# Altium PCB STM32_display_test_board.PcbDoc
Units mil, origin at the board's own origin, x right, y up, seen from the top; angles counter-clockwise.
Board outline 3128.03 x 3003.03 mil, 4 copper layers (Top Layer(SIG/PWR), Int1 (GND), Int2 (GND), Bottom Layer(SIG/PWR)), stack 73.221 mil thick; 65 components, 73 nets, 303 pads, 105 vias.
Unrouted connection lines stored in the file: 17.
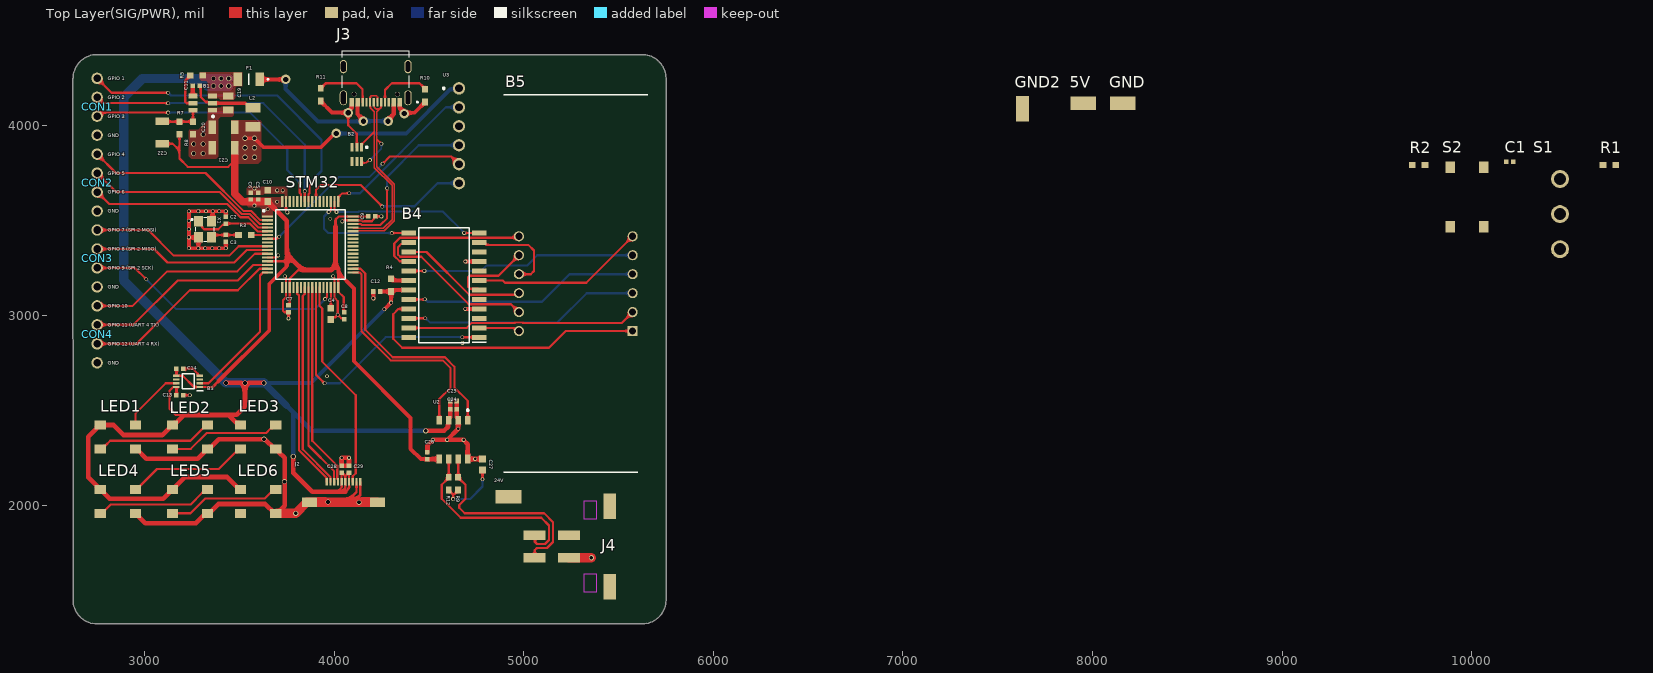
[diagram p0: Top Layer(SIG/PWR) view]
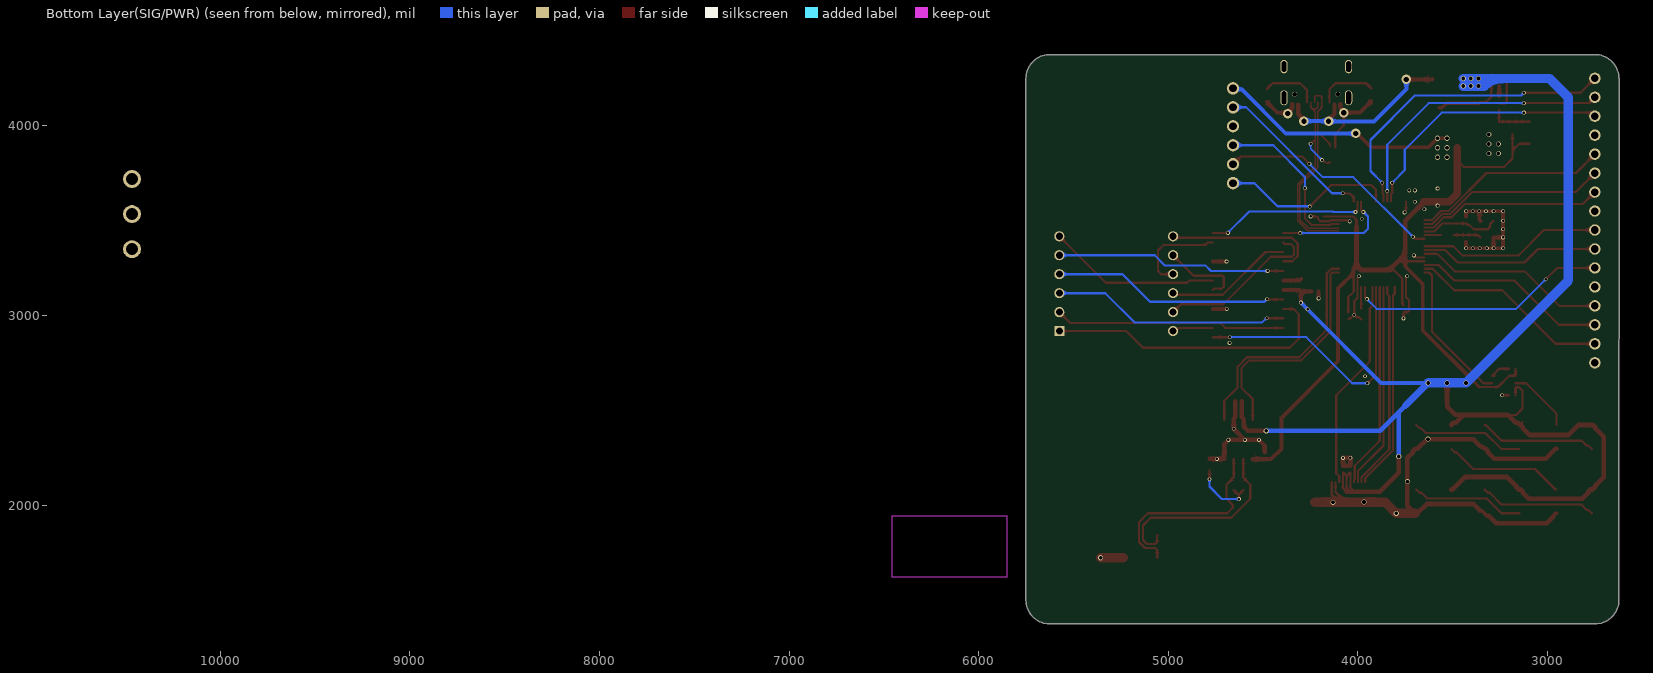
[diagram p1: Bottom Layer(SIG/PWR) view, seen from below]
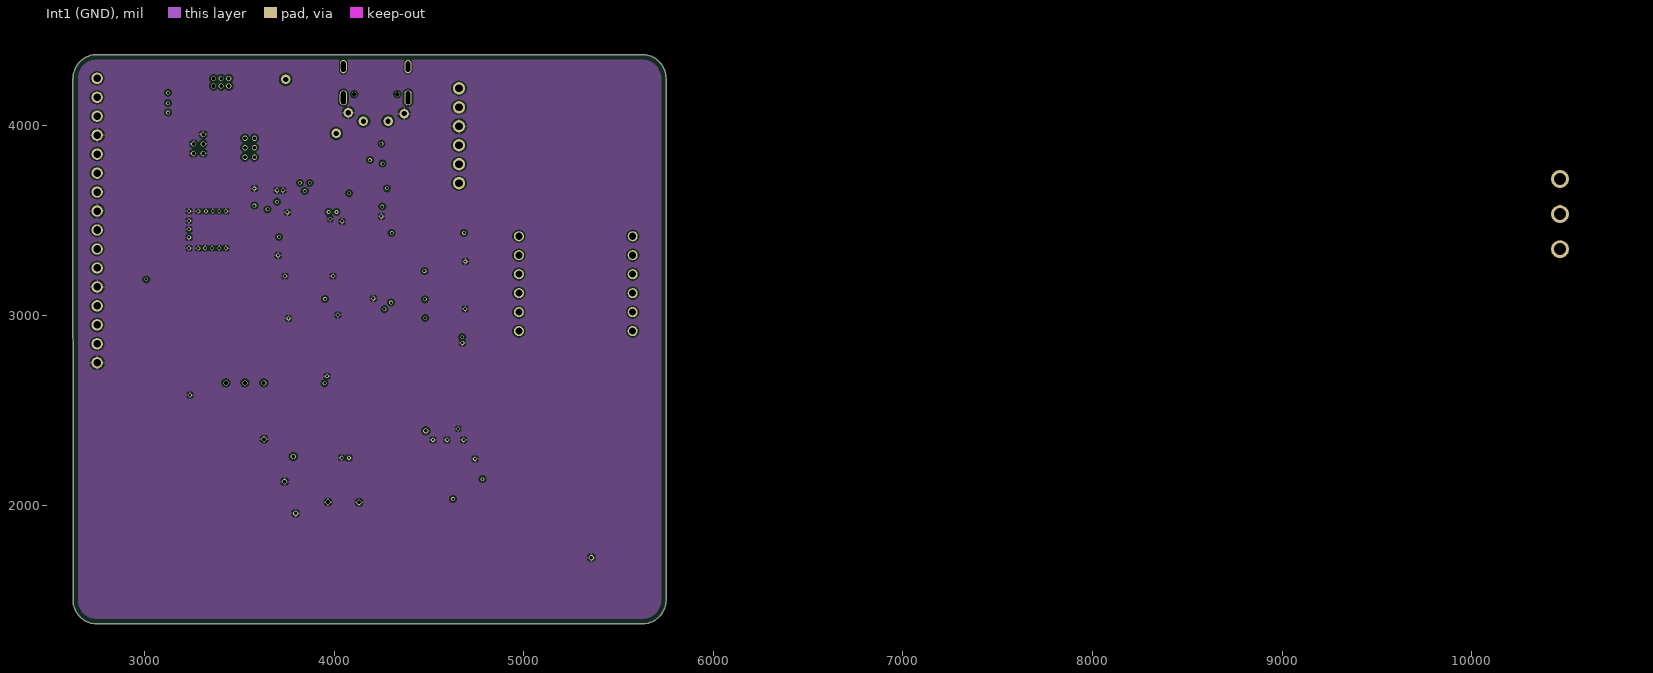
[diagram p2: Int1 (GND)]
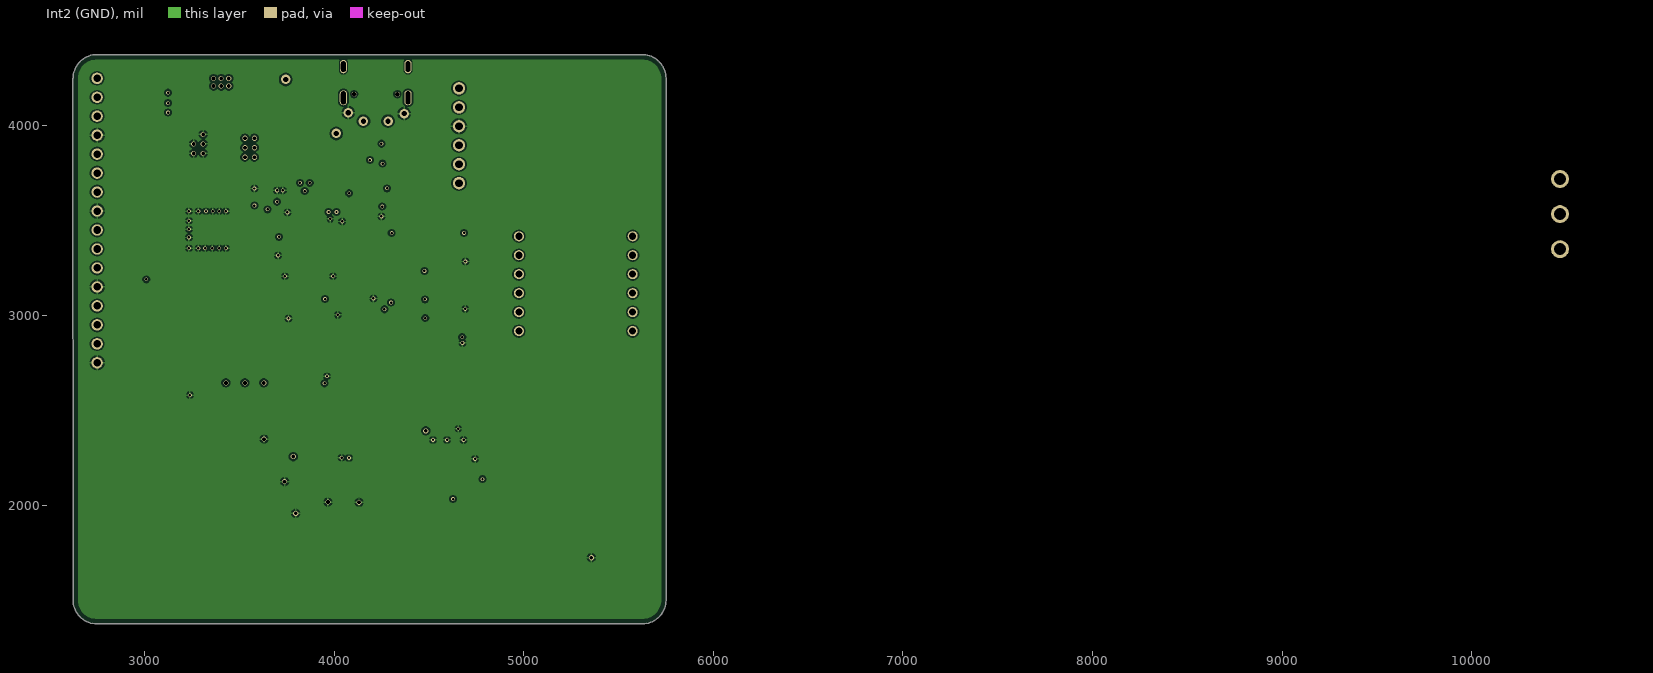
[diagram p3: Int2 (GND)]

## Layer stack, top to bottom
Top Solder: solder mask 1, SM-001, Dk 4
Top Layer(SIG/PWR): signal copper 1.378
Dielectric 2: prepreg 8.2835, PP-022, Dk 4.5
Int1 (GND): signal copper 5.9843
Dielectric 3: core 41.9291, Core-039, Dk 4.8
Int2 (GND): signal copper 5.9843
Dielectric 4: prepreg 8.2835, PP-022, Dk 4.5
Bottom Layer(SIG/PWR): signal copper 1.378
Bottom Solder: solder mask 1, SM-001, Dk 4

## Board outline
2623.99,1498.87 ccw(c2750,1500) 2748.87,1373.99 2750,1373.48 5625,1373.48 5626.13,1373.99 ccw(c5625,1500) 5751.01,1498.87 5751.51,1500 5751.52,4250 5751.01,4251.13 ccw(c5625,4250) 5632.3,4375.8 5631.01,4376.51 2750,4376.52 2748.87,4376.01 ccw(c2750,4250) 2623.99,4251.13 2623.49,4250

## Design rules (kind name [scope] priority, off if disabled: settings)
Clearance [All] p1: gap=10 ignorepadtopadclearanceinfootprint=FALSE except(0: Arc-Hole Track-Hole SMDPad-Hole Via-Hole Fill-Hole Poly-Hole Region-Hole Text-Text Text-Hole; 5: Arc-Arc Arc-Track Arc-SMDPad Track-Track Track-SMDPad SMDPad-SMDPad; 7.87: Arc-Text Track-Text SMDPad-Fill SMDPad-Poly SMDPad-Region THPad-Fill THPad-Poly THPad-Region Fill-Fill Fill-Poly Fill-Region Poly-Poly Poly-Region Region-Region; 12.99: Arc-THPad Track-THPad SMDPad-THPad; 19.68: THPad-THPad THPad-Hole)
DiffPairsRouting [All] p1: maxlimit=10 minlimit=5 mostfreqgap=10 toplayer_maxgap=5 toplayer_prefgap=5 toplayer_minwidth=7.81 toplayer_maxwidth=7.81 toplayer_prefwidth=7.81 bottomlayer_maxgap=5 bottomlayer_prefgap=5 bottomlayer_minwidth=7.81 bottomlayer_maxwidth=7.81 bottomlayer_prefwidth=7.81 impedanceprofiledriven=TRUE impedanceprofileid={41886173-6EE0-4018-A958-A0CD32709ABE} impedanceprofilevalue=90.000000 maxuncoupledlength=500
HoleSize Pad_HoleSize [IsPad] p1: absolutevalues=TRUE maxlimit=248.03 minlimit=19.68 maxpercent=80.000 minpercent=20.000
HoleSize [All] p2: absolutevalues=TRUE maxlimit=248.03 minlimit=7.87 maxpercent=80.000 minpercent=20.000
MinimumAnnularRing [All] p1: minimumring=7.87
PolygonConnect GND_PolygonConnect [OnLayer('Int1 (GND)') OR OnLayer('Int2 (GND)')] p1: connectstyle=Relief reliefconductorwidth=10 reliefentries=4 polygonreliefangle="90 Angle" airgapwidth=10
PolygonConnect [All] p2: connectstyle=Direct reliefconductorwidth=10 reliefentries=4 polygonreliefangle="90 Angle" airgapwidth=10
RoutingVias [All] p1: holewidth=28 width=50 viastyle="Through Hole" minholewidth=7.87 minwidth=9.84 maxholewidth=28 maxwidth=50
SilkToSilkClearance [All] p1: silktosilkclearance=0
SilkToSolderMaskClearance [IsPad] p1: minsilkscreentomaskgap=5.91 clearancetoexposedcopper=TRUE
SolderMaskExpansion [All] p1: expansion=4 istentingtop=FALSE
Width [All] p1: maxlimit=78.74 minlimit=7.87 preferedwidth=10
26 further rules are at their usual default settings.

## Classes and differential pairs
component class Power: 5V 24V B1 C11 C19 C20 C21 C22 F1 FRAME2 GND GND2 L2 R5 R7 R8
component class MCU: C1 C2 C3 C4 C5 C6 C7 C8 C9 C10 FRAME1 R1 R2 R3 S1 S2 STM32 X1
component class Connect: B2 B3 B4 B5 C12 C13 C14 C24 C25 C26 C27 C28 C29 CON1 CON2 CON3 CON4 FRAME3 J2 J3 J4 LED1 LED2 LED3 LED4 LED5 LED6 R4 R9 R10 R11 R12 U2 U3
differential pair MCU_USB: +MCU_USB_P -MCU_USB_N

## Components (designator, comment, footprint, x,y, rotation, side; value= is the part's Value field where it differs from the comment)
5V "Test Point for Probing" 5015 7950,4120 r0 top
24V "Test Point for Probing" 5015 4920,2045 r180 top
B1 "TPS54202DDCR" SOT-23-6 3307,4120 r90 top
B2 "TPD4E1U06DCKR" SC-70-6 4120,3850 r270 top
B3 "SN74LXC2T45DCUR" VSSOP-8 3230.58,2652.92 r180 top
B4 "MAX7221EWG+" SOIC-24 4580,3160 r180 top
B5 "LTC-5723HR" 7SEGMENT_DISP_12_P_TH 5275,3168 r180 top
C1 "100n" 0402_CAP 10200,3810 r0 top
C2 "10p" 0402_CAP 3430,3503.11 r270 top
C3 "10p" 0402_CAP 3430,3406.89 r90 top
C4 "4u7" 0603-CAP 3983,3009 r270 top
C5 "100n" 0402_CAP 3600,3630 r270 top
C6 "100n" 0402_CAP 3560,3630 r270 top
C7 "100n" 0402_CAP 3760,3036 r90 top
C8 "100n" 0402_CAP 4053,2998 r90 top
C9 "100n" 0402_CAP 4199,3523 r180 top
C10 "1u" 0603-CAP 3650,3630.47 r90 top
C11 "100n" 0402_CAP 3273.11,4211 r180 top
C12 "100n" 0402_CAP 4226,3127 r0 top
C13 "100n" 0402_CAP 3187.11,2580 r0 top
C14 "100n" 0402_CAP 3187,2719 r180 top
C19 "10u" 0805-CAP 3442,4121 r270 top
C20 "22u" 1206-CAP 3418.06,3993 r180 top
C21 "22u" 1206-CAP 3418.06,3884 r180 top
C22 "56p" 1206-CAP 3095,3965 r90 top
C24 "100n" 0402_CAP 4630,2505 r180 top
C25 "100n" 0402_CAP 4630,2549 r180 top
C26 "100n" 0402_CAP 4492,2261.11 r270 top
C27 "4n7" 0603-CAP 4783,2214.53 r270 top
C28 "100n" 0402_CAP 4040,2190 r270 top
C29 "100n" 0402_CAP 4079,2190 r270 top
CON1 "HEAD_4_P" 1X04 2751,4251 r0 top
CON2 "HEAD_4_P" 1X04 2751,3851 r0 top
CON3 "HEAD_4_P" 1X04 2751,3451 r0 top
CON4 "HEAD_4_P" 1X04 2751,3051 r0 top
F1 "1206L050YR" 1206-FUSE 3550,4246 r180 top
GND "Test Point for Probing" 5015 8160,4120 r0 top
GND2 "Test Point for Probing" 5015 7630,4090 r90 top
J2 "505110-1092" MOLEX_FPC_CLAMSHELL_10 4050,2025 r0 top
J3 "CONNECTOR_USB_C" VALCON_USB_C 4219.84,4125 r180 top
J4 "HyTech CAN Connector" MOLEX_MICROFIT_SMD_RIGHTANGLE_04_DUAL 5454,1782 r90 top
L2 "10u" 1210_IND 3572,4045 r270 top
LED1 "IN-PI55QATPRPGPBPW-40  Neopixel RGBW LED  Datasheet" NEOPIXEL 2860,2360 r0 top
LED2 "IN-PI55QATPRPGPBPW-40  Neopixel RGBW LED  Datasheet" NEOPIXEL 3240,2360 r0 top
LED3 "IN-PI55QATPRPGPBPW-40  Neopixel RGBW LED  Datasheet" NEOPIXEL 3600,2360 r0 top
LED4 "IN-PI55QATPRPGPBPW-40  Neopixel RGBW LED  Datasheet" NEOPIXEL 2860,2020 r0 top
LED5 "IN-PI55QATPRPGPBPW-40  Neopixel RGBW LED  Datasheet" NEOPIXEL 3240,2020 r0 top
LED6 "IN-PI55QATPRPGPBPW-40  Neopixel RGBW LED  Datasheet" NEOPIXEL 3600,2020 r0 top
R1 "10k" 0603-RES 10725,3795 r0 top
R2 "10k" 0603-RES 9720,3795 r0 top
R3 "0R" 0603-RES 3530,3425 r0 top
R4 "9.53k" 0603-RES 4301,3160 r270 top
R5 "100k" 0603-RES 3275,4265 r180 top
R7 "100k" 0603-RES 3185,3989 r90 top
R8 "22k" 0603-RES 3256,3989 r270 top
R9 "60R4" 0603-RES 4655,2114 r270 top
R10 "5k1" 0603-RES 4480,4160 r270 top
R11 "5k1" 0603-RES 3930,4165 r270 top
R12 "60R4" 0603-RES 4605,2114 r90 top
S1 "Single pole, double throw switch  Datasheet" CS12ANW03 10465,3535 r0 top
S2 "Button Datasheet" B3S-100X 9975,3625 r90 top
STM32 "STM32F446RET6" LQFP-64-STM32 3875,3375 r0 top
U2 "TCAN1051" "SOIC-08(NARROW,0-15\")" 4630,2346 r180 top
U3 "ST_LINK_SW_DEBUG" HEADER_6_P 4659,3698 r0 top
X1 "Crystal  Datasheet Recommended load capacitor for the ECS-160-10-42-CKM-TR:  VJ0603A150FXQPW1BC" XTAL_SMD3225-4P 3320,3455 r270 top

## Footprints (in the part's own frame and the unit in brackets; to place one, negate y for a bottom-side part, rotate by r counter-clockwise, add the part's x,y. Pads: shape width x height; smd on the part's side, far side on the other; paste and mask are expansions set on the pad)
1X04 [mil]
  round 60 hole 40: 1(0,0) 2(0,-100) 3(0,-200) 4(0,-300)
7SEGMENT_DISP_12_P_TH [mm]
  rect 1.35x1.35 / inner round 1.35 / far side rect 1.35x1.35 hole 0.95: 1(-7.62,6.35)
  round 1.35 hole 0.95: 2(-7.62,3.81) 3(-7.62,1.27) 4(-7.62,-1.27) 5(-7.62,-3.81) 6(-7.62,-6.35) 7(7.62,-6.35) 8(7.62,-3.81) 9(7.62,-1.27) 10(7.62,1.27) 11(7.62,3.81) 12(7.62,6.35)
  silkscreen extent -9.62,-25.27 9.62,25.27, body extent -9.55,-25.15 9.45,25.15, height 8.25
0402_CAP [mm]
  rect 0.6x0.62 smd: 1(-0.46,0) 2(0.46,0)
  body extent -0.5,-0.25 0.5,0.25, height 0.33
0603-CAP [mil]
  rect 35.43x35.43 smd: 1(-29.53,0) 2(29.53,0)
  body extent -36,-19 33,19, height 36
0603-RES [mil]
  rect 35.43x31.5 smd: 1(-33.46,0) 2(33.46,0)
  body extent -31,-16 31,16, height 22
0805-CAP [mil]
  rect 37.4x55.12 smd: 1(-36.42,0) 2(36.42,0)
  body extent -40,-25 40,25, height 37
1206-CAP [mm]
  rect 1x1.8 smd: 1(-1.5,0) 2(1.5,0)
  body extent -1.6,-0.8 1.6,0.8, height 0.94
1206-FUSE [mm]
  rect 1.16x1.82 smd: 1(-1.475,0) 2(1.475,0)
  silkscreen extent -2.7,-0.72 0,0.72, body extent -1.6,-0.83 1.6,0.83, height 1.25
1210_IND [mm] "Inductor of 1210 Case  Size"
  rect 1.25x2 smd: 1(-1.275,0) 2(1.275,0)
  body extent -1.6,-1.25 1.6,1.25, height 1.7
5015 [mil]
  rect 135x70 smd: 1(0,0)
B3S-100X [mil]
  rect 61.02x51.18 smd: 1(156.5,-88.58) 2(-156.5,-88.58) 3(156.5,88.58) 4(-156.5,88.58)
CS12ANW03 [mm]
  round 2.4 hole 1.6: 1(0,-4.7) 2(0,0) 3(0,4.7)
HEADER_6_P [mil]
  round 65 hole 40: 1(0,500) 2(0,400) 3(0,300) 4(0,200) 5(0,100) 6(0,0)
  silkscreen extent -85,495 -75,505
LQFP-64-STM32 [mm] "64 pin LQFP package for STM32F446RET6 and similar"
  rect 1.475x0.3 smd: 1(-5.738,3.75) 2(-5.738,3.25) 3(-5.738,2.75) 4(-5.738,2.25) 5(-5.738,1.75) 6(-5.738,1.25) 7(-5.738,0.75) 8(-5.738,0.25) 9(-5.738,-0.25) 10(-5.738,-0.75) 11(-5.738,-1.25) 12(-5.738,-1.75) 13(-5.738,-2.25) 14(-5.738,-2.75) 15(-5.738,-3.25) 16(-5.738,-3.75) 33(5.738,-3.75) 34(5.738,-3.25) 35(5.738,-2.75) 36(5.738,-2.25) 37(5.738,-1.75) 38(5.738,-1.25) 39(5.738,-0.75) 40(5.738,-0.25) 41(5.738,0.25) 42(5.738,0.75) 43(5.738,1.25) 44(5.738,1.75) 45(5.738,2.25) 46(5.738,2.75) 47(5.738,3.25) 48(5.738,3.75)
  rect 0.3x1.475 smd: 17(-3.75,-5.738) 18(-3.25,-5.738) 19(-2.75,-5.738) 20(-2.25,-5.738) 21(-1.75,-5.738) 22(-1.25,-5.738) 23(-0.75,-5.738) 24(-0.25,-5.738) 25(0.25,-5.738) 26(0.75,-5.738) 27(1.25,-5.738) 28(1.75,-5.738) 29(2.25,-5.738) 30(2.75,-5.738) 31(3.25,-5.738) 32(3.75,-5.738) 49(3.75,5.738) 50(3.25,5.738) 51(2.75,5.738) 52(2.25,5.738) 53(1.75,5.738) 54(1.25,5.738) 55(0.75,5.738) 56(0.25,5.738) 57(-0.25,5.738) 58(-0.75,5.738) 59(-1.25,5.738) 60(-1.75,5.738) 61(-2.25,5.738) 62(-2.75,5.738) 63(-3.25,5.738) 64(-3.75,5.738)
  silkscreen extent -6.35,-4.65 4.65,4.65, body extent -6,-6 6,6, height 1.6
MOLEX_FPC_CLAMSHELL_10 [mm]
  rect 0.3x1 smd: 1(-2.25,2.475) 2(-1.75,2.475) 3(-1.25,2.475) 4(-0.75,2.475) 5(-0.25,2.475) 6(0.25,2.475) 7(0.75,2.475) 8(1.25,2.475) 9(1.75,2.475) 10(2.25,2.475)
  rect 2x1.3 smd: 11(-4.55,-0.225) 12(4.55,-0.225)
  body extent -5.25,-2.6 5.25,2.7, height 1.88
MOLEX_MICROFIT_SMD_RIGHTANGLE_04_DUAL [mil]
  rect 50x115 smd: 1(59.06,215.5) 2(-59.06,215.5) 3(59.06,397.5) 4(-59.06,397.5)
  rect 135x65 smd: PAD1(212.06,0) PAD2(-212.06,0)
  Top Layer(SIG/PWR) keep-out region: 144.56,71 144.56,134 240.56,134 240.56,71
  Top Layer(SIG/PWR) keep-out region: -240.56,71 -240.56,134 -144.56,134 -144.56,71
  Top Layer(SIG/PWR) keep-out region: -240.56,71 -240.56,134 -144.56,134 -144.56,71
  Top Layer(SIG/PWR) keep-out region: 144.56,71 144.56,134 240.56,134 240.56,71
  Bottom Layer(SIG/PWR) keep-out region: -159.06,-1005 -159.06,-395 159.06,-395 159.06,-1005
  body extent -274,-180 264,426, height 345
NEOPIXEL [mm]
  rect 1.5x1.2 smd: 1(-2.35,1.6) 2(-2.35,-1.6) 3(2.35,-1.6) 4(2.35,1.6)
  body extent -2.6,-2.5 2.6,2.5, height 1.7
SC-70-6 [mm]
  rect 1.2x0.4 smd: 1(-0.95,0.65) 2(-0.95,0) 3(-0.95,-0.65) 4(0.95,-0.65) 5(0.95,0) 6(0.95,0.65)
  silkscreen extent -1.06,1.22 -0.82,1.46, body extent -1.05,-1 1.05,1, height 1
"SOIC-08(NARROW,0-15\")" [mil]
  rect 30x45 smd: 1(-75,-102.5) 2(-25,-102.5) 3(25,-102.5) 4(75,-102.5) 5(75,102.5) 6(25,102.5) 7(-25,102.5) 8(-75,102.5)
  silkscreen extent -81,-160 -70,-149, body extent -97,-119 97,119, height 64
SOIC-24 [mm]
  rect 1.925x0.65 smd: 1(-4.712,6.985) 2(-4.712,5.715) 3(-4.712,4.445) 4(-4.712,3.175) 5(-4.712,1.905) 6(-4.712,0.635) 7(-4.712,-0.635) 8(-4.712,-1.905) 9(-4.712,-3.175) 10(-4.712,-4.445) 11(-4.712,-5.715) 12(-4.712,-6.985) 13(4.712,-6.985) 14(4.712,-5.715) 15(4.712,-4.445) 16(4.712,-3.175) 17(4.712,-1.905) 18(4.712,-0.635) 19(4.712,0.635) 20(4.712,1.905) 21(4.712,3.175) 22(4.712,4.445) 23(4.712,5.715) 24(4.712,6.985)
  silkscreen extent -5.68,-7.7 3.4,7.7, body extent -5.16,-7.7 5.16,7.7, height 2.65
SOT-23-6 [mm]
  rect 0.62x1.22 smd: 1(-0.95,-1.31) 2(0,-1.31) 3(0.95,-1.31) 4(-0.95,1.31) 5(0,1.31) 6(0.95,1.31)
  silkscreen extent -1.9,-1.52 -1.65,-1.27, body extent -1.45,-1.4 1.45,1.4, height 1.1
VALCON_USB_C [mm] "VALCON_CSP-USC16-TR"
  rect 0.3x1.14 smd: A1(-3.35,0) A4(-2.55,0) A5(-1.25,0) A6(-0.25,0) A7(0.25,0) A8(1.25,0) A9(2.55,0) A12(3.35,0) B1(3.05,0) B4(2.25,0) B5(1.75,0) B6(0.75,0) B7(-0.75,0) B8(-1.75,0) B9(-2.25,0) B12(-3.05,0)
  oval 1x2 hole 0.65 slot 1.72 at 90 deg: S1(-4.325,-0.59) S2(4.325,-0.59)
  oval 0.9x1.8 hole 0.65 slot 1.4 at 90 deg: S3(-4.325,-4.77) S4(4.325,-4.77)
  round 0.65 hole 0.65 unplated: ""(-2.89,-1.07) ""(2.89,-1.07)
  silkscreen extent -5.68,-6.86 4.47,0.1, body extent -4.47,-7.3 4.47,0.45, height 3.26
VSSOP-8 [mm]
  rect 0.85x0.3 smd: 1(-1.575,0.75) 2(-1.575,0.25) 3(-1.575,-0.25) 4(-1.575,-0.75) 5(1.575,-0.75) 6(1.575,-0.25) 7(1.575,0.25) 8(1.575,0.75)
  silkscreen extent -2,-1 0.8,1.25, body extent -1.55,-1 1.55,1, height 0.77
XTAL_SMD3225-4P [mm]
  rect 1.4x1.2 smd: 1(-1.1,-0.85) 2(1.1,-0.85) 3(1.1,0.85) 4(-1.1,0.85)
  silkscreen extent -1.6,-1.8 1.6,1.25, body extent -1.6,-1.25 1.6,1.25, height 0.7

## Part data
5V 24V GND GND2: library part TEST_POINT, Manufacturer="Keystone Electronics", MPN=5015, DeviceSetName=TEST_POINT, DKPN=36-5015CT-ND, GateName_1=G$1, LibraryName=HyTechDevices, MOPN=534-5015, Package=5015, SymbolName_1=TEST_POINT
B1: "4.5V to 28V Input, 2A Output, EMI Friendly Synchronous Step-Down Converter", Manufacturer_Name="Texas Instruments", Mouser Part Number=595-TPS54202DDCR, Datasheet Link=http://www.ti.com/lit/gpn/tps54202, Geometry.Height=1.1mm, Manufacturer_Part_Number=TPS54202DDCR, Mouser Price/Stock=https://www.mouser.co.uk/ProductDetail/Texas-Instruments/TPS54202DDCR?qs=uP22XH7NdCsJtN%2Fq54jCtQ%3D%3D
B2: "Quad-Channel High-Speed ESD Protection Device", Manufacturer_Name="Texas Instruments", Mouser Part Number=595-TPD4E1U06DCKR, Datasheet Link=http://www.ti.com/lit/gpn/tpd4e1u06, Geometry.Height=1.1mm, Manufacturer_Part_Number=TPD4E1U06DCKR, Mouser Price/Stock=https://www.mouser.co.uk/ProductDetail/Texas-Instruments/TPD4E1U06DCKR?qs=FBI%252BX3tnPf27UOVCu86Dnw%3D%3D
B3: library part LEVEL_SHIFTER_3V3_TO_5V, "Translation - Voltage Levels 2-bit dual supply transceiver with configurable voltage-level shifting and 3-state outputs", Manufacturer_Name="Texas Instruments", Mouser Part Number=595-SN74LXC2T45DCUR, Datasheet Link=https://www.ti.com/lit/ds/symlink/sn74lxc2t45.pdf?ts=1639472823475&ref_url=https%253A%252F%252Fwww.ti.com%252Fproduct%252FSN74LXC2T45%253FkeyMatch%253DSN74LXC2T45DCUR%2526tisearch%253Dsearch-everything%2526usecase%253DOPN, Geometry.Height=0.9mm, Manufacturer_Part_Number=SN74LXC2T45DCUR, Mouser Price/Stock=https://www.mouser.co.uk/ProductDetail/Texas-Instruments/SN74LXC2T45DCUR?qs=TCDPyi3sCW3DKJ9sPzuW6Q%3D%3D
B4: "MAX7221EWG+, LED Display Driver, 8-Digits 64-Segments, 4  5.5 V, 24-Pin SOIC W", Manufacturer_Name="Analog Devices", Mouser Part Number=700-MAX7221EWG, Datasheet Link=http://datasheets.maximintegrated.com/en/ds/MAX7219-MAX7221.pdf, Geometry.Height=2.65mm, Manufacturer_Part_Number=MAX7221EWG+, Mouser Price/Stock=https://www.mouser.co.uk/ProductDetail/Analog-Devices-Maxim-Integrated/MAX7221EWG%2b?qs=1THa7WoU59EcwjgGV%252Bu7MA%3D%3D
B5: library part LED_7_SEGMENT_4_DIGIT, "LED Displays & Accessories 4 Digit, Red Normal Current, Common  Cathode", Manufacturer_Name=Lite-On, Manufacturer_Part_Number=LTC-4627JR, Mouser Part Number=859-LTC-4627JR, Datasheet Link=https://componentsearchengine.com/Datasheets/1/LTC-4627JR.pdf, Geometry.Height=7.25mm, Mouser Price/Stock=https://www.mouser.co.uk/ProductDetail/Lite-On/LTC-4627JR?qs=WxFF5lh7QM3%252BoGt5Rn2nWQ%3D%3D
C1 C5 C6 C7 C8 C9 C11 C12 C13 C14 C24 C25 C26 C28 C29: library part CAPACITOR_?_*0402, Capacitance=0.1µF, Manufacturer=Yageo, MPN=CC0603KRX7R0BB104, Package=0603-CAP, Tolerance=10%, Voltage=100V, DeviceName=0603, DeviceSetName=CAPACITOR_?_*, DKPN=311-1523-1-ND, GateName_1=G$1, LibraryName=HyTechDevices, MOPN=603-CC603KRX7R0BB104, SymbolName_1=CAPACITOR
C2 C3: library part CAPACITOR_?_*0402, "C0G", Capacitance=0.1µF, Manufacturer=Yageo, MPN=CC0603KRX7R0BB104, Package=0603-CAP, Tolerance=10%, Voltage=100V, DeviceName=0603, DeviceSetName=CAPACITOR_?_*, DKPN=311-1523-1-ND, GateName_1=G$1, LibraryName=HyTechDevices, MOPN=603-CC603KRX7R0BB104, SymbolName_1=CAPACITOR
C4 C10 C27: library part CAPACITOR_?_*0603, Capacitance=0.1µF, Manufacturer=Yageo, MPN=CC0603KRX7R0BB104, Package=0603-CAP, Tolerance=10%, Voltage=100V, DeviceName=0603, DeviceSetName=CAPACITOR_?_*, DKPN=311-1523-1-ND, GateName_1=G$1, LibraryName=HyTechDevices, MOPN=603-CC603KRX7R0BB104, SymbolName_1=CAPACITOR
C19: library part CAPACITOR_?_*0805, Capacitance=0.22µF, Manufacturer=KEMET, MPN=C0805C224K1RACTU, Package=0805-CAP, Tolerance=10%, Voltage=100V, DeviceName=0805, DeviceSetName=CAPACITOR_?_*, DKPN=399-8049-1-ND, GateName_1=G$1, LibraryName=HyTechDevices, MOPN=80-C0805C224K1R, SymbolName_1=CAPACITOR
C20 C21 C22: library part CAPACITOR_?_*1206, Capacitance=2.2µF, Manufacturer="AVX Corporation", MPN=12061C225K4T2A, Package=1206-CAP, Tolerance=10%, Voltage=100V, DeviceName=1206, DeviceSetName=CAPACITOR_?_*, DKPN=478-12144-1-ND, GateName_1=G$1, LibraryName=HyTechDevices, MOPN=581-12061C225K4T2A, SymbolName_1=CAPACITOR
CON1 CON2 CON3 CON4: library part CONNECTOR_HEADER_4, "4 Pin Standard Header"
F1: library part FUSE_RESETTABLE_1206, "Resettable POLYFUSE 100A 6V Littelfuse 0.5A Surface Mount Resettable Fuse, 6 V dc", Manufacturer_Name=LITTELFUSE, Mouser Part Number=576-1206L050YR, Datasheet Link=https://m.littelfuse.com/~/media/electronics/datasheets/resettable_ptcs/littelfuse_ptc_1206l_datasheet.pdf.pdf, Geometry.Height=0.75mm, Manufacturer_Part_Number=1206L050YR, Mouser Price/Stock=https://www.mouser.co.uk/ProductDetail/Littelfuse/1206L050YR?qs=PWhpLWeW8wckT8hV5jLiAA%3D%3D
J2: library part CONNECTOR-10_MOLEX_FPC_CLAMSHELL, Manufacturer_Name=Molex, Package=5051101092, DeviceSetName=505110-1092, GateName_1=G$1, Height=0mm, LibraryName=505110-1092, Manufacturer_Part_Number=505110-1092, Mouser_Part_Number=538-505110-1092, Mouser_Price-Stock=https://www.mouser.co.uk/ProductDetail/Molex/505110-1092?qs=BA62vJVifGrjJfo6A8tlOw%3D%3D, SymbolName_1=505110-1092
J3: "CSP-USC16-TR Valcon USB Type C Surface Mount PCB Socket", Package=None, Availability="In Stock", Check_prices=https://www.snapeda.com/parts/CSP-USC16-TR/Valcon/view-part/?ref=eda, MF=Valcon, MP=CSP-USC16-TR, Price=None, Purchase-URL=https://pricing.snapeda.com/search/part/CSP-USC16-TR/?ref=eda, SnapEDA_Link=https://www.snapeda.com/parts/CSP-USC16-TR/Valcon/view-part/?ref=snap
J4: library part CONNECTOR-CAN_?_*μF_S_RA, Manufacturer=Molex, MPN=0430450411, Package=MOLEX_MICROFIT_SMD_RIGHTANGLE_04_DUAL, DeviceName=μF_S_RA, DeviceSetName=CONNECTOR-CAN_?_*, DKPN=WM1832CT-ND, GateName_1=G$1, LibraryName=HyTechDevices, MOPN=538-43045-0411, SymbolName_1=CONNECTOR_CAN
L2: library part INDUCTOR_1210, CURRENT_RATED=1.4A, CURRENT_SATURATION=2A, INDUCTANCE=56µH, Manufacturer="Wurth Elektronik", MPN=74437349560, Package=WE-LMHI, Tolerance=20%, DCR=342mΩ, DeviceName=WELMHI, DeviceSetName=INDUCTOR_?_*, DKPN=732-11454-2-ND, GateName_1=G$1, LibraryName=HyTechDevices, MOPN=710-74437349560, SymbolName_1=INDUCTOR
LED1 LED2 LED3 LED4 LED5 LED6: library part NEOPIXEL_*IN-PI55QATPRPGPBPW-40, Manufacturer=Inolux, MPN=IN-PI55QATPRPGPBPW-40, Package=NEOPIXEL, DeviceName=IN-PI55QATPRPGPBPW-40, DeviceSetName=NEOPIXEL_*, DKPN=1830-1210-2-ND, GateName_1=G$1, LibraryName=HyTechDevices, MOPN=743-I55QATPRPGPBPW40, SymbolName_1=NEOPIXEL
R1 R2 R3 R4 R5 R7 R8 R9 R10 R11 R12: library part RESISTOR_?_*0603, Manufacturer=Yageo, MPN=RC0603FR-070RL, Package=0603-RES, POWER=0.1W, Resistance=0, Tolerance=1%, VOLTAGE_CONTINUOUS=75V, DeviceName=0603, DeviceSetName=RESISTOR_?_*, DKPN=311-0.0HRCT-ND, GateName_1=G$1, LibraryName=HyTechDevices, MOPN=603-RC0603FR-070RL, SymbolName_1=RESISTOR, VOLTAGE_MAX=75V
S1: library part SWITCH_SPDT_*, Manufacturer="NKK Switches", MPN=CS12ANW03, DeviceSetName=SWITCH_SPDT_*, DKPN=360-2131-ND, GateName_1=G$1, LibraryName=HyTechDevices, MOPN=633-CS12ANW03, Package=CS12ANW03, SymbolName_1=SWITCH_SPDT
S2: library part BUTTON, Manufacturer=Omron, MPN=B3S-1000, Package=B3S-100X, DeviceSetName=BUTTON, DKPN=SW415-ND, GateName_1=G$1, LibraryName=HyTechDevices, MOPN=653-B3S-1000, SymbolName_1=BUTTON
STM32: "32-Bit MCU+DSP 512K Flash 180MHz LQFP64 STMicroelectronics STM32F446RET6, 32bit ARM Cortex M4 MCU, 180MHz, 512 kB Flash, 64-Pin LQFP", Manufacturer_Name=STMicroelectronics, Mouser Part Number=511-STM32F446RET6, Datasheet Link=https://datasheet.datasheetarchive.com/originals/distributors/DKDS41/DSANUWW0028583.pdf, Geometry.Height=1.6mm, Manufacturer_Part_Number=STM32F446RET6, Mouser Price/Stock=https://www.mouser.co.uk/ProductDetail/STMicroelectronics/STM32F446RET6?qs=Ok1pvOkw6%2FqpQsWf8F4wtQ%3D%3D
U2: library part TCAN1051*V-Q1, Manufacturer="Texas Instruments", MPN=TCAN1051HGVDRQ1, Package="SOIC-08(NARROW,0.15\")", DeviceSetName=TCAN1051*V-Q1, DKPN=296-49935-1-ND, GateName_1=G$1, LibraryName=HyTechDevices, MOPN=595-TCAN1051HGVDQ1, SymbolName_1=CAN_TRANSCIEVER_TCAN1051*V
U3: library part CONNECTOR_ST_LINK
X1: library part CRYSTAL_SMD3225-4P, FREQUENCY=24Mhz, LOAD_CAPACITANCE=10pF, Manufacturer="Yangxing Tech", MPN=X322524MMB4SI, Package=SMD3225-4P, SHUNT_CAPACITANCE="2 - 5 pF", DeviceSetName=CRYSTAL_*, DKPN=XC2566CT-ND, GateName_1=G$1, LibraryName=HyTechDevices, MOPN=X322524MMB4SI, SymbolName_1=CRYSTAL

## Via types
v1: diameter 20, hole 13, Top Layer(SIG/PWR) to Bottom Layer(SIG/PWR), tented both sides, 71 vias
v2: diameter 27, hole 20, Top Layer(SIG/PWR) to Bottom Layer(SIG/PWR), tented both sides, 28 vias
v3: diameter 50, hole 28, Top Layer(SIG/PWR) to Bottom Layer(SIG/PWR), tented both sides, 6 vias

## Nets (pads, with @x,y where several pads share a name; then routed paths per layer and width w, separated by ;. In a path a pad name is that pad's centre, name@x,y a point inside that pad or via, vN(x,y) a via of type N, cw(c..) or ccw(c..) an arc to the next point about the centre after c; other vN are vias at no path point)
3V3_BOOT: B1.6 C11.2 | length 53.8
  Top Layer(SIG/PWR) w20: C11.2 3255.22,4210.79 3255.22,4157.62 B1.6
3V3_EN: B1.5 R5.2 | length 192
  Top Layer(SIG/PWR) w12: R5.2 3239.58,4265 3229.83,4255.25 3229.83,4253.29 3216,4239.46 3216,4127.03 3223.03,4120 B1.5
3V3_FB: B1.4 C22.2 R7.2 R8.1 | length 222
  Top Layer(SIG/PWR) w12: C22.2 3096.6,4022.46 R7.2 R8.1 3256,4082.03 B1.4
3V3_SW: B1.2 C11.1 L2.1 | length 359.3
  Top Layer(SIG/PWR) w12: C11.1 3297,4205.22 3297,4153 3323.8,4126.21 3352.37,4126.21 B1.2
  Top Layer(SIG/PWR) w17: B1.2 3532.43,4120 3557.24,4095.2 L2.1
7SEG_LOAD: B4.12 STM32.50 | length 859.8
  Top Layer(SIG/PWR) w11.5: STM32.50 4002.95,3556.05 v1(4013,3546) ; v1(4686,3436) 4686.5,3435.5 4765.01,3435.5 B4.12
  Bottom Layer(SIG/PWR) w11.5: v1(4013,3546) 4129,3546 4131.75,3548.75 4573.25,3548.75 v1(4686,3436)
+3V3: B3.1 B3.5 C5.2 C6.2 C7.2 C8.2 C9.2 C10.1 C14.2 C20.1 C21.1 C22.1 C26.2 L2.2 R1.1 R7.1 S1.1 STM32.1 STM32.13 STM32.19 STM32.32 STM32.48 STM32.64 U2.5 U3.1 | length 6316.5
  Top Layer(SIG/PWR) w11.5: C22.1 3149.06,3905.94 3185,3870 ; C14.2 3168.73,2718.84 3168.73,2682.61 B3.5 3202.55,2682.45 3261.45,2623.55 3292.43,2623.55 B3.1 3360.39,2623.39 ; R7.1 3185,3870 ; 3477.12,3818.12 3443,3784 3229,3784 3185,3828 3185,3870 ; STM32.13 3751,3286.42 3787.58,3286.42 ; C7.2 3760.39,3054.11 3766.73,3060.45 STM32.19 3766.73,3195.24 3811.49,3240 3834,3240 ; 4008,3467 4008,3506 4024.64,3522.64 STM32.48 4101.06,3522.79 4180.68,3522.79 C9.2 ; 4022.64,3225.36 STM32.32 4022.64,3125.96 4051,3097.6 C8.2@4051,3016.11
  Top Layer(SIG/PWR) w15: 3360.39,2623.39 3389,2652
  Top Layer(SIG/PWR) w20: 3389,2652 3659,2922 3659,3167.43 3751,3259.43 3751,3286.42 3751,3323 ; v2(3530,3935) v2(3580,3935) 3628,3887 3930.88,3887 4003.88,3960 v3(4012,3960) ; 4008,3263 4022.64,3248.36 4022.64,3225.36 4105,3143 4105,2759 4404,2460 4404,2297 4457.94,2243.06 C26.2@4491.55,2243.06
  Top Layer(SIG/PWR) w23.5: C26.2 4492.06,2243.06 4554.56,2243.06 U2.5
  Top Layer(SIG/PWR) w25: C10.1 3751,3499.94 3751,3323 3787.58,3286.42 3834,3240 3985,3240 4008,3263 4008,3467
  Top Layer(SIG/PWR) w40: C21.1 3477.12,3818.12 3477.12,3799 3477.12,3642.88 3519.06,3600.94 C10.1
  Bottom Layer(SIG/PWR) w20: v3(4012,3960) 4381,3960 4614.81,4193.81 4654.81,4193.81 U3.1
  other v1: 3650,3560 3580,3580 3700,3600
  other v2: 3530,3835 3580,3835 3530,3885 3580,3885
+5V: 5V.1 B1.3 B3.8 B4.19 C12.2 C13.1 C19.1 C24.2 C25.2 C28.2 C29.2 F1.2 J2.5 J2.6 J2.7 LED1.1 LED2.1 LED3.1 LED4.1 LED5.1 LED6.1 R4.2 R5.1 U2.3 | length 8847.9
  Top Layer(SIG/PWR) w11.5: LED2.1@3132.58,2437.89 LED2.1 ; B3.8 B3.8@3168.41,2623.24 ; C13.1 3169,2623.24 B3.8@3168.41,2623.24 ; 3210,2476 3166,2476 3132.58,2509.42 3132.58,2602.92 3152.89,2623.24 B3.8@3168.41,2623.24 ; 4015,2070 4040.01,2095.01 4040.01,2122.29 J2.5 4040.08,2122.52 4040.08,2171.81 C28.2 4040.39,2171.89 4059.84,2152.44 J2.6 4059.84,2089.84 4040,2070 ; 4059.84,2153.12 4078.61,2171.89 C29.2 ; 4060,2070 4079.38,2089.38 J2.7@4079.38,2122.6 ; C29.2@4079.38,2171.51 J2.7@4079.38,2122.6 ; J2.7 J2.7@4079.38,2122.6
  Top Layer(SIG/PWR) w20: C12.2 4244.34,3126.77 4300.77,3126.77 R4.2 ; v1(4266,3033) v1(4301,3068) R4.2 ; B4.19 4307.5,3135 4301,3128.51 R4.2
  Top Layer(SIG/PWR) w21: 4040,2070 4060,2070
  Top Layer(SIG/PWR) w23.5: v2(4484,2392) 4580.28,2392 4601.75,2413.47 4601.75,2452.75 4611.89,2462.89 C25.2
  Top Layer(SIG/PWR) w24.5: 3442,2476 3486,2476 3530,2520 3530,2545 ; 3530,2625 3550,2645 v2(3630,2645) ; v2(3785,2256) 3785,2170 3885,2070 4015,2070 4040,2070
  Top Layer(SIG/PWR) w25: v2(3430,2645) 3510,2645 3530,2625 ; LED6.1 3501.57,2082.99 3436.56,2148 3212.49,2148 3164.51,2100.02 3164.51,2094.11 3153.39,2082.99 LED5.1 3141.57,2082.99 3130.45,2071.87 3130.45,2065.96 3098.49,2034 2816.47,2034 2784.51,2065.96 2784.51,2071.87 2773.39,2082.99 LED4.1 2761.57,2082.99 2750.45,2094.11 2750.45,2100.02 2704,2146.47 2704,2361.43 2750.45,2407.88 2750.45,2411.87 2761.57,2422.99 LED1.1 2837.01,2422.99 2890,2370 3094.49,2370 3130.45,2405.96 3130.45,2411.87 3141.57,2422.99 LED2.1 3158.6,2434.11 3168.11,2434.11 3210,2476 3442,2476 3483.89,2434.11 3496.36,2434.11 LED3.1 ; 3530,2545 3530,2625 ; v2(3530,2645) 3530,2625
  Bottom Layer(SIG/PWR) w20: v2(3630,2645) 3878,2645 v1(4266,3033) v1(4301,3068)
  Bottom Layer(SIG/PWR) w24.5: 3750,2525 3785,2490 ; v2(3785,2256) 3785,2490 ; v2(4484,2392) 3883,2392 3785,2490
  Bottom Layer(SIG/PWR) w35: v2(3630,2645) 3750,2525
  Bottom Layer(SIG/PWR) w50: v2(3445,4210) v2(3405,4210) v2(3365,4210) 3335,4210 3295,4250 ; v2(3445,4250) v2(3405,4250) v2(3365,4250) 3295,4250 ; v2(3630,2645) v2(3530,2645) v2(3430,2645) 2890,3185 2890,4150 2990,4250 3295,4250
+5VIN: F1.1 J3.A4 J3.A9 J3.B4 J3.B9 | length 1000.8
  Top Layer(SIG/PWR) w22: F1.1 3609.07,4245 v3(3745,4245) ; J3.A9@4124.54,4113.56 4124.54,4063.03 4155,4032.58 v3(4155,4025) ; v3(4285,4025) 4285,4032.58 4315.14,4062.72 J3.A4@4315.14,4113.56
  Bottom Layer(SIG/PWR) w22: v3(3745,4245) 3745,4195 3916,4024 4154,4024 v3(4155,4025) v3(4285,4025)
+24VIN: 24V.1 J4.1
CAN_HIGH: J4.4 R9.1 U2.7 | length 1072.5
  Top Layer(SIG/PWR) w11.5: U2.7 R9.1 4655,2145.5 4693,2107.5 4693,2034 4660,2001 4660,1986 4689,1957 5108,1957 5155.21,1909.78 5155.21,1806.22 5123,1774 5070,1774 5058.44,1762.44 5058.44,1724.88 J4.4
CAN_LOW: J4.3 R12.2 U2.6 | length 1050.6
  Top Layer(SIG/PWR) w11.5: U2.6 R12.2 4605,2145.5 4568,2108.5 4568,2034 4668,1934 5093,1934 5134,1893 5134,1816 5113,1795 5070,1795 5059.45,1805.55 5059.45,1838.11 J4.3
DIGIT_1: B4.2 B5.12 | length 216.5
  Top Layer(SIG/PWR) w11.5: B4.2 4946.73,2935 4963.73,2918 B5.12
DIGIT_2: B4.11 B5.9 | length 500.1
  Top Layer(SIG/PWR) w11.5: B4.11 4790.61,3385 4802.93,3372.68 5024.32,3372.68 5054.26,3342.74 5054.26,3235.26 5037,3218 B5.9
DIGIT_3: B4.6 B5.8 | length 430.3
  Top Layer(SIG/PWR) w11.5: B4.6 4758.47,3142.05 4717.95,3142.05 4708,3152 4708,3203.26 4714.74,3210 4867,3210 B5.8
DIGIT_4: B4.7 B5.6 | length 916.2
  Top Layer(SIG/PWR) w11.5: B4.7 4889.55,3185 4901.87,3172.68 5329.68,3172.68 B5.6
GND: B1.1 B2.2 B3.4 B4.4 B4.9 C1.1 C2.1 C3.1 C4.2 C5.1 C6.1 C7.1 C8.1 C9.1 C10.2 C12.1 C13.2 C14.1 C19.2 C20.2 C21.2 C24.1 C25.1 C26.1 C27.1 C28.1 C29.1 CON1.4 CON2.4 CON3.4 CON4.4 GND2.1 GND.1 J2.9 J2.10 J2.11 J2.12 J3.A1 J3.A12 J3.B1 J3.B12 J4.2 LED1.3 LED2.3 LED3.3 LED4.3 LED5.3 LED6.3 R2.2 R8.2 R10.2 R11.2 S2.3 S2.4 STM32.12 STM32.18 STM32.31 STM32.47 STM32.63 U2.2 U2.8 U3.3 X1.2 X1.4 | length 6467.2
  Top Layer(SIG/PWR) w11.5: C14.1 3256.03,2719 3281.6,2693.43 3281.6,2682.61 3281.76,2682.45 B3.4 ; C13.2 v1(3240,2580) ; STM32.12 3694.34,3306.1 3705,3316.77 v1(3705,3317) ; v1(3741,3207) 3741,3204.7 3747.05,3198.65 3747.05,3096.05 3731,3080 3731,3025 3738,3018 3759.89,3018 C7.1 v1(3760,2985) ; STM32.63 3747.05,3553.25 3754,3546.3 v1(3754,3544) ; C4.2 3994.97,2991.44 4007.61,2991.44 v1(4020,3003.83) ; v1(3995,3207) 3995,3204.7 4002.95,3196.75 4002.95,3092.93 4020,3075.88 v1(4020,3003.83) ; v1(4043,3496) 4045.3,3496 4052.25,3502.95 4144.05,3502.95 4149.83,3497.17 4198.53,3497.17 4211.05,3509.69 4211.05,3516.94 C9.1 v1(4250,3523) ; C8.1@4050.61,2979.89 4044.55,2985.95 4037.88,2985.95 v1(4020,3003.83) ; 4065,2016.14 4118.9,2070.04 J2.9 ; v3(4075,4070) 4075,4003.87 4120,3958.87 B2.2 ; 4100,2016.14 4138.58,2054.72 J2.10
  Top Layer(SIG/PWR) w20: LED4.3 2958.43,1957.01 2972.05,1943.39 LED4.3@2972.05,1937.48 ; X1.2 X1.2@3285,3411.69 ; LED5.3@3310.39,1943.39 3318.9,1943.39 3346.14,1970.63 LED5.3@3354.63,1970.63 ; X1.4 3360,3504.84 v1(3360,3550) ; C3.1 v1(3430,3355) v1(3285,3355) ; C2.1 v1(3430,3550) v1(3360,3550) ; LED6.3@3686.61,1957.01 LED6.3 ; R11.2 3930,4129.58 3989.58,4070 v3(4075,4070) ; v1(4207.89,3090.11) C12.1 ; v3(4370,4065) 4374.58,4069.58 4425,4069.58 4480,4124.58 R10.2 ; v1(4692,3035) B4.4 ; v1(4693,3285) B4.9 ; v1(3235,3411.69) v1(3235,3550) v1(3360,3550) ; v1(3235,3411.69) X1.2@3285,3411.69 ; v1(3235,3411.69) v1(3235,3355) v1(3285,3355) ; v1(3285,3355) X1.2@3285,3411.69
  Top Layer(SIG/PWR) w23.5: v3(4075,4070) 4075,4077.17 4093.8,4095.97 J3.A12@4093.8,4114.31 ; J3.B12@4345.77,4114.31 4345.77,4096.41 4370,4072.17 v3(4370,4065) ; C26.1 4492.39,2279.22 4492.45,2279.28 4492.45,2314.45 v1(4522,2344) v1(4596,2344) ; C25.1 4648.11,2462.89 4655,2456 v1(4655,2403) v1(4596,2344) ; C27.1 4782.72,2243.78 4705.28,2243.78 U2.8 4705,2322 v1(4683,2344) v1(4596,2344) ; v1@4076.59,2250 cw(c4076.59,2246.59) v1(4079,2249) ; v1@4076.59,2250 cw(c4076.59,2246.59) v1(4079,2249) ; v1@4076.59,2250 cw(c4076.59,2246.59) v1(4079,2249) ; v1@4076.59,2250 cw(c4076.59,2246.59) v1(4079,2249) ; v1@4076.59,2250 cw(c4076.59,2246.59) v1(4079,2249) ; v1@4076.59,2250 cw(c4076.59,2246.59) v1(4079,2249) ; v1@4076.59,2250 cw(c4076.59,2246.59) v1(4079,2249) ; v1@4076.59,2250 cw(c4076.59,2246.59) v1(4079,2249) ; v1@4076.59,2250 v1(4040,2250) C28.1 C29.1 v1(4079,2249)
  Top Layer(SIG/PWR) w25: LED1.3 2958.43,2297.01 3010.44,2245 3280.51,2245 3315.49,2279.98 3315.49,2285.89 3326.61,2297.01 LED2.3 3343.64,2308.13 3352.13,2308.13 3392,2348 v2(3631,2348) 3631.38,2347.62 3636,2347.62 3686.61,2297.01 3698.43,2297.01 3709.55,2285.89 3709.55,2279.98 3739.55,2249.98 3739.55,1998.13 3698.43,1957.01 LED6.3 ; LED4.3@2972.05,1937.48 3004.53,1905 3272,1905 LED5.3@3310.39,1943.39 ; LED5.3@3354.63,1970.63 3390,2006 3637.62,2006 LED6.3@3686.61,1957.01
  Top Layer(SIG/PWR) w50: LED6.3@3698.43,1957.01 v2(3797.96,1957.01) 3856.5,2015.55 3870.28,2015.55 J2.11 4065,2016.14 4100,2016.14 J2.12 ; J4.2 v2(5356.94,1722.94)
  other v1: 4744,2243.78 3963,2680 4676.97,2855.82 3320,3355 3357.5,3355 3395,3355 3235,3455 3235,3500 3980,3510 3285,3550 3325,3550 3395,3550 3700,3660 3730,3660 3580,3670
  other v2: 4132,2015 3967.93,2016.14 3739.55,2124.05 3260,3855 3310,3855 3260,3905 3310,3905 3310,3955
GPIO_1: CON1.1 STM32.57 | length 1671.2
  Top Layer(SIG/PWR) w11.5: CON1.1 2827,4175 v1(3125,4175) ; STM32.57 3865.16,3639.8 3871.22,3645.86 3871.22,3699.22 v1(3872,3700)
  Bottom Layer(SIG/PWR) w11.5: v1(3125,4175) 3140,4160 3700,4160 3934,3926 3934,3762 v1(3872,3700)
GPIO_2: CON1.2 STM32.58 | length 1498.3
  Top Layer(SIG/PWR) w11.5: CON1.2 2782,4120 v1(3125,4120) ; STM32.58 v1(3845.47,3656.53)
  Bottom Layer(SIG/PWR) w11.5: v1(3125,4120) 3626.42,4120 3845.75,3900.67 3845.75,3656.81 v1(3845.47,3656.53)
GPIO_3: CON1.3 STM32.59 | length 1395.1
  Top Layer(SIG/PWR) w11.5: CON1.3 2770,4070 v1(3125,4070) ; v1(3820,3700) 3819.72,3699.72 3819.72,3645.86 3825.79,3639.8 STM32.59
  Bottom Layer(SIG/PWR) w11.5: v1(3125,4070) 3558,4070 3753,3875 3753,3767 v1(3820,3700)
GPIO_4: CON2.1 STM32.2 | length 1042.3
  Top Layer(SIG/PWR) w11.5: CON2.1 2850,3752 3322,3752 3522,3552 3562,3552 3610.89,3503.11 3648.94,3503.11 STM32.2
GPIO_5: CON2.2 STM32.3 | length 1009
  Top Layer(SIG/PWR) w11.5: CON2.2 2851,3651 3398,3651 3514,3535 3555,3535 3606.58,3483.42 3648.94,3483.42 STM32.3
GPIO_6: CON2.3 STM32.4 | length 975.7
  Top Layer(SIG/PWR) w11.5: CON2.3 2814,3588 3437.67,3588 3507.17,3518.5 3547.5,3518.5 3602.26,3463.74 3648.94,3463.74 STM32.4
GPIO_10: CON4.1 STM32.11 | length 1011.9
  Top Layer(SIG/PWR) w11.5: CON4.1 2938,3051 3120,3233 3490,3233 3582.79,3325.79 STM32.11
IOX_RST: STM32.39
LED_1_2: LED1.2 LED2.4 | length 617.2
  Top Layer(SIG/PWR) w11.5: LED1.2 2785.35,2314.88 2794.88,2314.88 2820,2340 3243.62,2340 3326.61,2422.99 LED2.4
LED_2_3: LED2.2 LED3.4 | length 597.2
  Top Layer(SIG/PWR) w11.5: LED2.2 3245.01,2297.01 3329,2381 3642,2381 3666.12,2405.12 3674.65,2405.12 LED3.4
LED_3_4: LED3.2 LED4.4 | length 643.6
  Top Layer(SIG/PWR) w11.5: LED4.4 2958.43,2082.99 3066.44,2191 3392,2191 3480.14,2279.14 3489.61,2279.14 LED3.2
LED_4_5: LED4.2 LED5.4 | length 617.2
  Top Layer(SIG/PWR) w11.5: LED4.2 2785.35,1974.88 2793.88,1974.88 2823,2004 3244,2004 3305.12,2065.12 3314.65,2065.12 LED5.4
LED_5_6: LED5.2 LED6.4 | length 597.2
  Top Layer(SIG/PWR) w11.5: LED5.2 3243.01,1957.01 3321,2035 3635,2035 3665.12,2065.12 3674.65,2065.12 LED6.4
LED_IN: B3.7 LED1.4 | length 342.3
  Top Layer(SIG/PWR) w11.5: LED1.4 2952.52,2482.87 3112.58,2642.92 3168.41,2642.92 B3.7
MCU_BOOT_0: S1.2 STM32.60
MCU_CAN2_RX: STM32.33 U2.4 | length 1198.1
  Top Layer(SIG/PWR) w11.5: STM32.33 4135.69,3227.36 4145,3218.05 4145,2917.16 4298.66,2763.5 4573.66,2763.5 4615,2722.16 4615,2620 4555,2560 U2.4
MCU_CAN2_TX: STM32.34 U2.1 | length 1232.4
  Top Layer(SIG/PWR) w11.5: STM32.34 4139.34,3247.05 4164.69,3221.7 4164.69,2925.32 4310,2780 4585,2780 4634.69,2730.32 4634.69,2620.32 4705,2550 U2.1
MCU_I2C_SCL: STM32.41
MCU_I2C_SDA: STM32.40
MCU_LED: B3.2 STM32.16 | length 772.2
  Top Layer(SIG/PWR) w11.5: B3.2 3292.74,2643.24 3338.24,2643.24 3610,2915 3610,3211.4 3625.96,3227.36 STM32.16
MCU_NRST: C1.2 R1.2 S2.1 S2.2 STM32.7 U3.5 | length 1206.9
  Top Layer(SIG/PWR) w11.5: STM32.7 3697.23,3404.53 3707.7,3415 v1(3710,3415) ; v1(4256.29,3800.71) 4294.58,3839 4618,3839 U3.5
  Bottom Layer(SIG/PWR) w11.5: v1(3710,3415) 4025,3730 4185.58,3730 v1(4256.29,3800.71)
MCU_OSC_IN: C2.2 STM32.5 X1.1 | length 419.2
  Top Layer(SIG/PWR) w11.5: X1.1 3304.41,3480.44 3304.41,3464.59 3314,3455 3390,3455 3413.94,3478.94 3423.94,3478.94 C2.2 3555,3485 3596.1,3443.9 STM32.5
MCU_OSC_OUT: R3.2 STM32.6 | length 86.6
  Top Layer(SIG/PWR) w11.5: R3.2 3563.46,3424.21 STM32.6 STM32.6@3648.94,3424.37
MCU_SPI1_MISO: STM32.22
MCU_SPI1_MOSI: J2.2 STM32.23 | length 1091.8
  Top Layer(SIG/PWR) w11.5: STM32.23 3845.47,3114.31 3834.68,3103.52 3834.68,2295.32 3980.95,2149.06 3980.95,2122.6 J2.2
MCU_SPI1_SCK: J2.1 STM32.21 | length 1091
  Top Layer(SIG/PWR) w11.5: STM32.21 3806.1,3114.31 3815,3105.41 3815,2290 3961.27,2143.74 3961.27,2122.6 J2.1
MCU_SPI2_MISO: CON3.2 STM32.10 | length 954.6
  Top Layer(SIG/PWR) w11.5: CON3.2 3051,3351 3122,3280 3474,3280 3539.47,3345.47 STM32.10
MCU_SPI2_MOSI: CON3.1 STM32.9 | length 974.4
  Top Layer(SIG/PWR) w11.5: CON3.1 3020,3451 3155,3316 3448,3316 3497.16,3365.16 STM32.9
MCU_SPI2_SCK: CON3.3 STM32.29 | length 1379.5
  Top Layer(SIG/PWR) w11.5: CON3.3 2950,3251 v1(3010,3191) ; v1(3953,3087) 3963.58,3097.58 STM32.29
  Bottom Layer(SIG/PWR) w11.5: v1(3010,3191) 3166,3035 3901,3035 v1(3953,3087)
MCU_SPI3_MISO: STM32.52
MCU_SPI3_MOSI: B4.1 STM32.26 | length 1441.5
  Top Layer(SIG/PWR) w11.5: STM32.26 3904.53,2688.47 v1(3950,2643) ; v1(4676,2886) 4676.5,2885.5 4765.01,2885.5 B4.1
  Bottom Layer(SIG/PWR) w11.5: v1(3950,2643) 4030,2643 4273,2886 v1(4676,2886)
MCU_SPI3_SCK: B4.13 STM32.51 | length 614.9
  Top Layer(SIG/PWR) w11.5: v1(3971,3546) 3983.27,3558.27 STM32.51 ; v1(4304,3435) B4.13
  Bottom Layer(SIG/PWR) w11.5: v1(3971,3546) 3947,3522 3947,3458 3970,3435 v1(4304,3435)
MCU_SWCLK: STM32.49 U3.2 | length 855.8
  Top Layer(SIG/PWR) w11.5: STM32.49 4022.64,3624.04 4042.98,3644.37 4079.37,3644.37 v1(4080,3645)
  Bottom Layer(SIG/PWR) w11.5: v1(4080,3645) 4137,3645 4590,4098 U3.2
MCU_SWDIO: STM32.46 U3.4 | length 861.9
  Top Layer(SIG/PWR) w11.5: STM32.46 4101.06,3483.11 4140.55,3483.11 4145.67,3478 4245,3478 4280,3513 v1(4280,3671)
  Bottom Layer(SIG/PWR) w11.5: v1(4280,3671) 4280,3731 4447,3898 U3.4
MCU_SWO: STM32.55 U3.6 | length 924.8
  Top Layer(SIG/PWR) w11.5: STM32.55 3904.53,3662.53 3930,3688 4140.75,3688 v1(4254.25,3574.5)
  Bottom Layer(SIG/PWR) w11.5: v1(4254.25,3574.5) 4255.75,3576 4424,3576 4546,3698 U3.6
MCU_UART_4_RX: CON4.3 STM32.15 | length 1062.1
  Top Layer(SIG/PWR) w11.5: CON4.3 2958,2851 3240,3133 3493,3133 3607.05,3247.05 STM32.15
MCU_UART_4_TX: CON4.2 STM32.14 | length 1028.9
  Top Layer(SIG/PWR) w11.5: CON4.2 2942,2951 3176,3185 3492,3185 3573.73,3266.73 STM32.14
MCU_USB_N: B2.6 J3.A7 J3.B7 STM32.44 | length 1173
  Top Layer(SIG/PWR) w7.81: STM32.44 4102.9,3445.9 4134.73,3445.9 4136.17,3447.33 4151.8,3447.33 4151.94,3447.19 4265.31,3447.19 4318.75,3500.63 4318.75,3691.25 4226.25,3783.75 4226.25,3929.5 ; B2.6 4145.59,3808.97 4149.56,3805 4171.23,3805 4186.23,3820 v1(4189.53,3820) ; J3.A7 4212,4123 4212,4098 4220,4090 4241,4090 ; J3.B7 4248.04,4123.67 4248.04,4097.04 4241,4090 ; v1(4250,3905.75) 4226.25,3929.5 ; 4226.25,3929.5 4226.25,4075.25 4241,4090
  Bottom Layer(SIG/PWR) w7.81: v1@4190,3820.47 4250,3880.47 v1(4250,3905.75)
MCU_USB_P: B2.1 J3.A6 J3.B6 STM32.45 | length 1102.8
  Top Layer(SIG/PWR) w7.81: STM32.45 4102.9,3461.58 4134.73,3461.58 4136.17,3460.15 4157.1,3460.15 4157.25,3460 4260,3460 4305.94,3505.94 4305.94,3685.94 4213.44,3778.44 4213.44,3970 ; B2.1 4145.59,3903.15 4212.44,3970 4213.44,3970 ; J3.A6 4228.81,4125.87 4228.81,4153.42 4224.24,4158 4195.76,4158 4191.19,4153.42 4191.19,4125.87 J3.B6 4191.3,4124.01 4191.3,4096.7 4213.44,4074.56 4213.44,3970
NetB4_18: B4.18 R4.1 | length 98.1
  Top Layer(SIG/PWR) w20: R4.1 4301,3191.5 4307.5,3185 B4.18
NetC27_2: C27.2 R9.2 R12.1 | length 367.6
  Top Layer(SIG/PWR) w11.5: R12.1 4605,2078.58 4628,2055.58 4628,2051.58 ; v1(4628,2032) 4628,2051.58 ; R9.2 4655,2078.58 4628,2051.58 ; v1(4783,2137) C27.2
  Bottom Layer(SIG/PWR) w11.5: v1(4628,2032) 4717,2032 4783,2098 v1(4783,2137)
NetJ3_A5: J3.A5 R10.1 | length 304.1
  Top Layer(SIG/PWR) w11.5: J3.A5 4269.21,4125.16 4269.21,4189.21 4305,4225 4450.43,4225 4480,4195.43 R10.1
NetJ3_B5: J3.B5 R11.1 | length 313.9
  Top Layer(SIG/PWR) w11.5: R11.1 3930,4200.43 3940,4210.43 3941.97,4210.43 3956.54,4225 4118.26,4225 4150.94,4192.32 J3.B5
NetR2_1: R2.1 S1.3
SEGA: B4.14 B5.11 | length 869.4
  Top Layer(SIG/PWR) w11.5: B4.14 4387.44,3377.95 4354.19,3377.95 4338,3361.76 4338,3321 4349,3310 4460,3310 4710,3060 4933,3060 B5.11
SEGB: B4.16 B5.7 | length 827.2
  Top Layer(SIG/PWR) w11.5: B4.16 4393.57,3285.92 4346.08,3285.92 4318,3314 4318,3380 4348.25,3410.25 4967.25,3410.25 B5.7
SEGC: B4.20 B5.4 | length 1245.5
  Top Layer(SIG/PWR) w11.5: B4.20 v1@4479,3085
  Bottom Layer(SIG/PWR) w11.5: v1(4479.5,3085.5) 4481.8,3085.5 4494.62,3072.68 5096.68,3072.68 5242,3218 B5.4
SEGD: B4.23 B5.2 | length 1216.4
  Top Layer(SIG/PWR) w11.5: B4.23 4699.62,2935 4726.07,2961.45 4954.37,2961.45 4956.23,2963.32 4993.77,2963.32 4995.63,2961.45 5518.45,2961.45 B5.2
SEGDP: B4.22 B5.3 | length 1253.8
  Top Layer(SIG/PWR) w11.5: B4.22 4394.99,2985.5 4480.5,2985.5 v1(4481,2986)
  Bottom Layer(SIG/PWR) w11.5: v1(4481,2986) 4483.3,2986 4505.3,2964 5178.64,2964 5332.64,3118 B5.3
SEGE: B4.21 B5.1 | length 1542.4
  Top Layer(SIG/PWR) w11.5: B4.21 4340,3035 4312,3007 4312,2878 4360,2830 5133.61,2830 5221.61,2918 B5.1
SEGF: B4.15 B5.10 | length 677
  Top Layer(SIG/PWR) w11.5: B4.15 4488,3335 4713,3110 4947.44,3110 ; 4947.47,3110.03 4967.03,3110.03 B5.10
SEGG: B4.17 B5.5 | length 1214.9
  Top Layer(SIG/PWR) w11.5: B4.17 v1(4477,3235)
  Bottom Layer(SIG/PWR) w11.5: v1(4477,3235) 4775,3235 4803.32,3263.32 5017.32,3263.32 5072,3318 B5.5
SHARP_CS: J2.3 STM32.24 | length 1082.8
  Top Layer(SIG/PWR) w11.5: STM32.24 3865.16,2314.84 4000.55,2179.45 4000.55,2148.79 4000.64,2148.7 4000.64,2122.6 J2.3
SHARP_EXTMODE: J2.8 STM32.27 | length 1112.2
  Top Layer(SIG/PWR) w11.5: STM32.27 3924.21,3050.79 3938,3037 3938,2757 4115,2580 4115,2168.67 4099.21,2152.88 J2.8
SHARP_VCOMM: J2.4 STM32.25 | length 1082.8
  Top Layer(SIG/PWR) w11.5: STM32.25 3884.84,2340.16 4017.05,2207.95 4017.05,2155.63 4017.45,2155.23 4017.45,2139.25 4020.47,2136.22 J2.4
VCAP_1: C4.1 STM32.30 | length 110.7
  Top Layer(SIG/PWR) w11.5: C4.1 3983.27,3038.8 STM32.30
XTAL_IN: C3.2 R3.1 X1.3 | length 148.6
  Top Layer(SIG/PWR) w11.5: X1.3 3366.77,3425 C3.2 R3.1
pads on no net: B2.3 B2.4 B2.5 B3.3 B3.6 B4.3 B4.5 B4.8 B4.10 B4.24 J3. J3.A8 J3.B8 J3.S1 J3.S2 J3.S3 J3.S4 J4.PAD1 J4.PAD2 LED6.2 STM32.8 STM32.17 STM32.20 STM32.28 STM32.35 STM32.36 STM32.37 STM32.38 STM32.42 STM32.43 STM32.53 STM32.54 STM32.56 STM32.61 STM32.62

## Polygon pours and split planes (outlines as drawn)
GND on Top Layer(SIG/PWR) "GND_L01_P001" (solid, pour order 1): 3626,3636 3632,3642 3736.81,3642 3741,3637.81 3741,3616 3753,3616 3753,3671 3746,3678 3548,3678 3540,3670 3540,3636
+5V on Top Layer(SIG/PWR) "+5V_L01_P002" (solid, pour order 2): 3478,4282 3515,4282 3515,4210 3488,4210 3478,4200 3478,4147 3470,4139 3399,4139 3393,4145 3334,4145 3334,4230 3325,4238 3300,4238 3291,4247 3291,4282 3359,4282
+3V3 on Top Layer(SIG/PWR) "+3V3_L01_P003" (solid, pour order 3): 3457,4029 3612,4029 3616,4025 3616,3815 3601,3800 3472,3800 3457,3815
GND on Top Layer(SIG/PWR) "GND_L01_P004" (solid, pour order 4): 3470,4103 3408,4103 3400,4095 3334,4095 3334,4029 3284,3979 3237,3979 3233,3975 3233,3839 3246,3826 3378,3826 3390,3838 3390,4035 3404,4049 3464,4049 3470,4055
+3V3 on Top Layer(SIG/PWR) "+3V3_L01_P000" (solid, pour order 0): 3716,3624 3722,3630 3733,3630 3733,3572 3691,3572 3678,3559 3678,3517 3620,3517 3620,3560 3608,3572 3549,3572 3540,3581 3540,3624
GND on Int1 (GND) "GND_L02_P005" (solid, pour order 5): 2650,4250 cw(c2750,4250) 2750,4350 5625,4350 cw(c5625,4250) 5725,4250 5725,1500 cw(c5625,1500) 5625,1400 2750,1400 cw(c2750,1500) 2650,1500 2650,1650
GND on Int2 (GND) "GND_L03_P006" (solid, pour order 6): 2650,4250 cw(c2750,4250) 2750,4350 5625,4350 cw(c5625,4250) 5725,4250 5725,1500 cw(c5625,1500) 5625,1400 2750,1400 cw(c2750,1500) 2650,1500 2650,1650

## Silkscreen, mask and mechanical layers (free items; w line width, h text height)
Top Overlay:
  text "GPIO 1" at 2806,4241 h20
  text "GPIO 2" at 2806,4141 h20
  text "GPIO 3" at 2806,4041 h20
  text "GND" at 2806,3941 h20
  text "GPIO 4" at 2806,3841 h20
  text "GPIO 5" at 2806,3741 h20
  text "GPIO 6" at 2806,3641 h20
  text "GND" at 2806,3541 h20
  text "GPIO 7 (SPI 2 MOSI)" at 2806,3441 h20
  text "GPIO 8 (SPI 2 MISO)" at 2806,3341 h20
  text "GPIO 9 (SPI 2 SCK)" at 2806,3241 h20
  text "GND" at 2806,3141 h20
  text "GPIO 10" at 2806,3041 h20
  text "GPIO 11 (UART 4 TX)" at 2806,2941 h20
  text "GPIO 12 (UART 4 RX)" at 2806,2841 h20
  text "GND" at 2806,2741 h20
Mechanical 1:
  lines w2: 2625,1500 ccw(c2750,1500) 2750,1375 ; 2625,4250 cw(c2750,4250) 2750,4375 ; 5625,1375 ccw(c5625,1500) 5750,1500 ; 5625,4375 cw(c5625,4250) 5750,4250
  lines w3: 2625,1500 2625,4250 ; 2750,1375 5625,1375 ; 2750,4375 5631.01,4375 ; 5750,1500 5750,4250

## Text inside footprints (layer, text, board x,y; h text height)
J3: Mechanical 13 "PCB Edge" at 4301.34,4384.84 h27.56 r180